# Allegro board ece457.brd
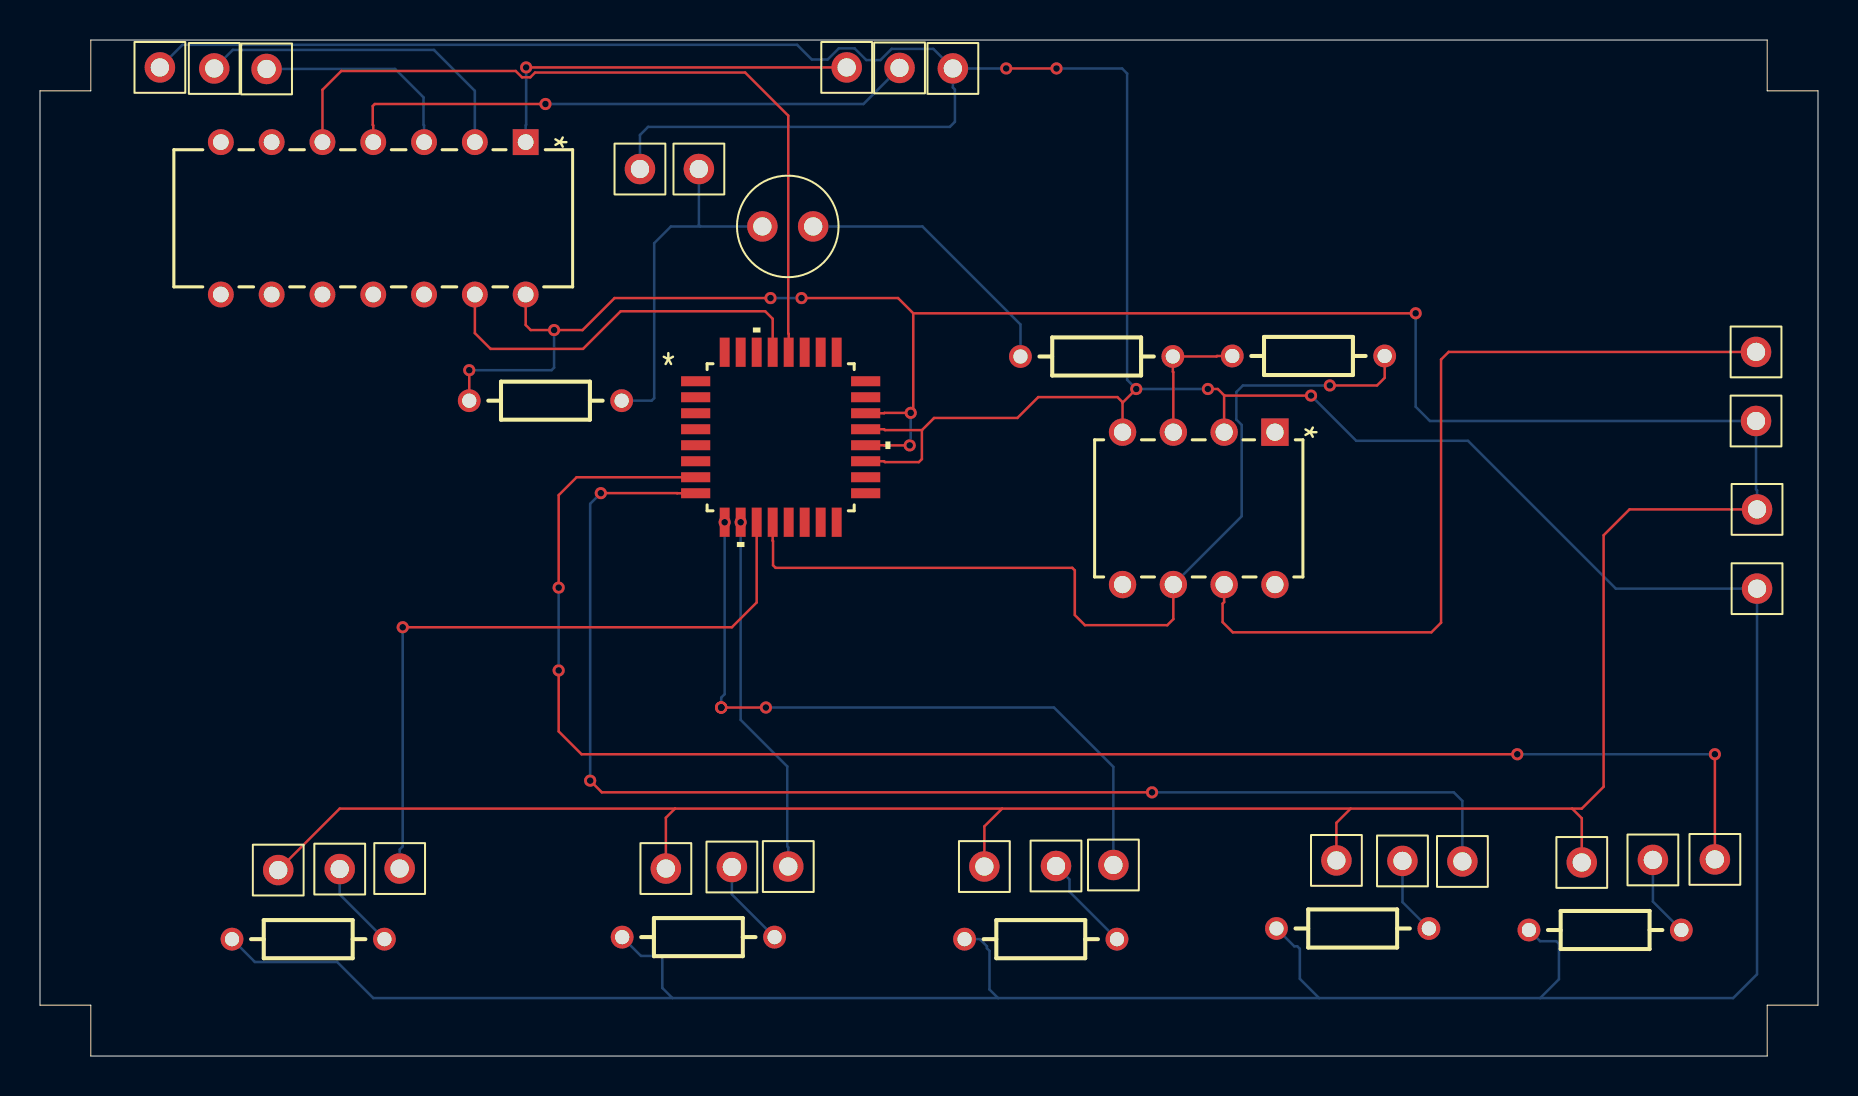
[diagram p0: board, top side]
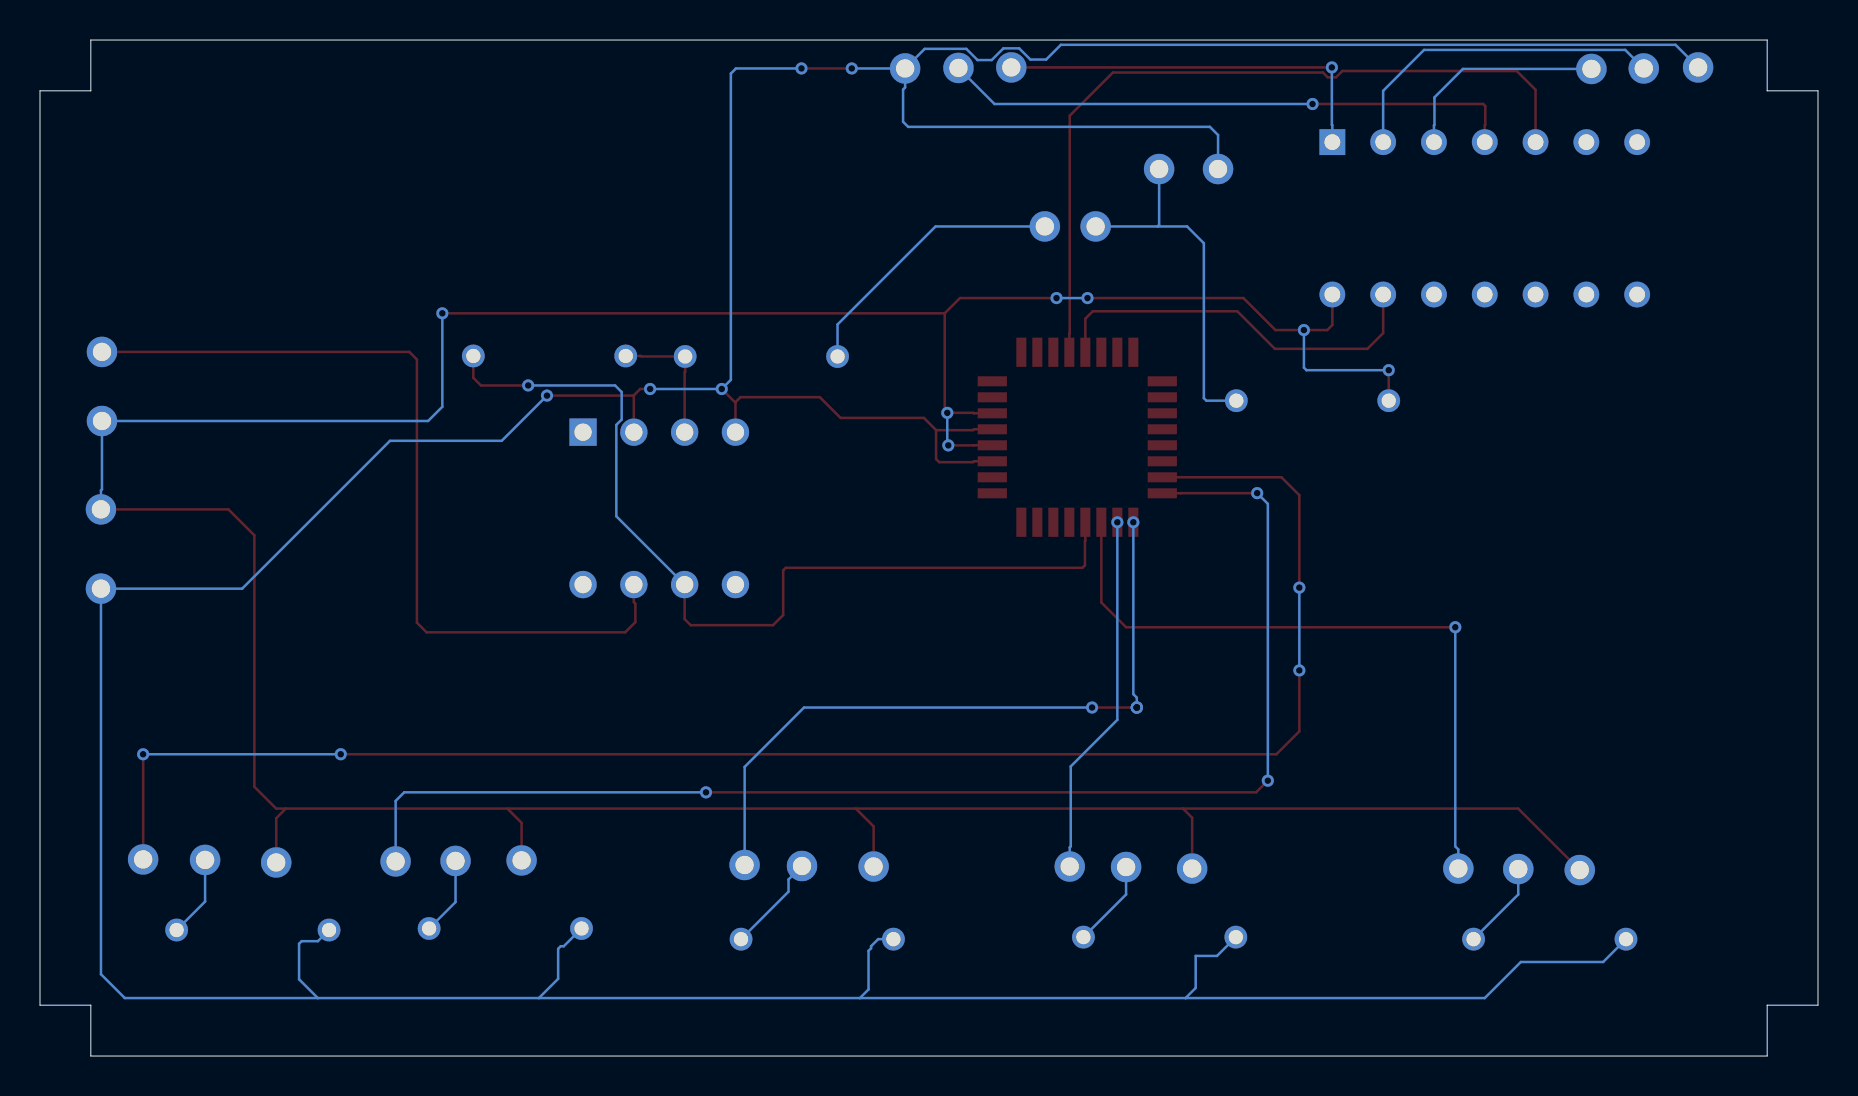
[diagram p1: board, bottom side, seen from below]

Outline 88.9 x 50.8 mm; copper layers: TOP, BOTTOM. Coordinates in mm from the lower left corner of the outline.
Outline path: 0,48.26 2.54,48.26 2.54,50.8 86.36,50.8 86.36,48.26 88.9,48.26 88.9,2.54 86.36,2.54 86.36,0 2.54,0 2.54,2.54 0,2.54 0,48.26

## Design rules (mm)
constraint set DEFAULT: min track width 0.127

## Placement (name value [footprint] x y rotation side)
C1  1u  [CAP196]  36.12 41.48 270 top
J7  CON1  [JUMPER1]  8.71 49.38 0 top
J8  CON1  [JUMPER1]  11.33 49.35 0 top
J9  CON1  [JUMPER1]  5.99 49.43 0 top
J10  CON1  [JUMPER1]  40.34 49.43 0 top
J11  CON1  [JUMPER1]  42.98 49.4 0 top
J12  CON1  [JUMPER1]  45.64 49.38 0 top
J13  CON1  [JUMPER1]  32.94 44.35 0 top
J14  CON1  [JUMPER1]  30 44.35 0 top
J15  CON1  [JUMPER1]  11.91 9.3 0 top
J16  CON1  [JUMPER1]  14.99 9.35 0 top
J17  CON1  [JUMPER1]  17.98 9.37 0 top
J18  CON1  [JUMPER1]  31.29 9.37 0 top
J19  CON1  [JUMPER1]  34.59 9.45 0 top
J20  CON1  [JUMPER1]  37.41 9.47 0 top
J21  CON1  [JUMPER1]  47.22 9.47 0 top
J22  CON1  [JUMPER1]  50.8 9.5 0 top
J23  CON1  [JUMPER1]  53.67 9.55 0 top
J24  CON1  [JUMPER1]  64.82 9.78 0 top
J25  CON1  [JUMPER1]  68.12 9.75 0 top
J26  CON1  [JUMPER1]  71.12 9.73 0 top
J27  CON1  [JUMPER1]  77.09 9.68 0 top
J28  CON1  [JUMPER1]  80.65 9.8 0 top
J29  CON1  [JUMPER1]  85.8 35.2 0 top
J30  CON1  [JUMPER1]  85.8 31.75 0 top
J31  CON1  [JUMPER1]  85.85 27.33 0 top
J32  CON1  [JUMPER1]  85.85 23.37 0 top
J33  CON1  [JUMPER1]  83.74 9.83 0 top
R6  2.2k  [AXRC05]  21.46 32.77 0 top
R7  RS  [AXRC05]  49.02 34.98 0 top
R8  RF  [AXRC05]  59.61 35 0 top
R9  4.7k  [AXRC05]  74.45 6.3 0 top
R10  4.7k  [AXRC05]  61.82 6.38 0 top
R11  4.7k  [AXRC05]  46.23 5.84 0 top
R12  4.7k  [AXRC05]  29.11 5.94 0 top
R13  4.7k  [AXRC05]  9.6 5.84 0 top
U11  ATMEGA328PB-AUR  [32A]  37.03 30.94 0 top
U12  UA741CPE4  [P8]  61.75 31.19 270 top
U13  CD4066BE  [N14]  24.28 45.69 270 top

## Library data of the parts
C1 = C: Tolerance: ***; User Part Number: ***
J7-J33 = CON1: User Part Number: ***
R6-R13 = R
U11 = ATMEGA328PB-AUR: User Part Number: PN; Tolerance: TOL
U12 = UA741CPE4: User Part Number: PN; Tolerance: TOL
U13 = CD4066BE: User Part Number: PN; Tolerance: TOL

## Footprints (pads in the part's own frame, mm; a bottom-side part is the same pattern mirrored in y, then rotated)
32A
  rect 1.461x0.501 smd: 1(-4.25,2.8) 2(-4.25,2) 3(-4.25,1.2) 4(-4.25,0.4) 5(-4.25,-0.4) 6(-4.25,-1.2) 7(-4.25,-2) 8(-4.25,-2.8) 17(4.25,-2.8) 18(4.25,-2) 19(4.25,-1.2) 20(4.25,-0.4) 21(4.25,0.4) 22(4.25,1.2) 23(4.25,2) 24(4.25,2.8)
  rect 0.501x1.461 smd: 9(-2.8,-4.25) 10(-2,-4.25) 11(-1.2,-4.25) 12(-0.4,-4.25) 13(0.4,-4.25) 14(1.2,-4.25) 15(2,-4.25) 16(2.8,-4.25) 25(2.8,4.25) 26(2,4.25) 27(1.2,4.25) 28(0.4,4.25) 29(-0.4,4.25) 30(-1.2,4.25) 31(-2,4.25) 32(-2.8,4.25)
AXRC05
  round 1.143 hole 0.711: 1(0,0) 2(7.62,0)
CAP196
  round 1.524 hole 0.914: 1(0,0) 2(0,2.54)
JUMPER1
  round 1.524 hole 0.914: 1(0,0)
N14
  rect 1.295x1.295 hole 0.787: 1(0,0)
  round 1.295 hole 0.787: 2(0,-2.54) 3(0,-5.08) 4(0,-7.62) 5(0,-10.16) 6(0,-12.7) 7(0,-15.24) 8(7.62,-15.24) 9(7.62,-12.7) 10(7.62,-10.16) 11(7.62,-7.62) 12(7.62,-5.08) 13(7.62,-2.54) 14(7.62,0)
P8
  rect 1.372x1.372 hole 0.864: 1(0,0)
  round 1.372 hole 0.864: 2(0,-2.54) 3(0,-5.08) 4(0,-7.62) 5(7.62,-7.62) 6(7.62,-5.08) 7(7.62,-2.54) 8(7.62,0)

## Nets
AVCC: U11.18
GND: U11.3
GND_1: U11.5
VCC: U11.4
VCC_1: U11.6(VCC_1)
VSS: U13.7(VSS)
0: J9.1 J12.1 J14.1 J32.1 R9.1 R10.1 R11.1 R12.1 R13.1 U11.19 U11.21 U12.2 U12.4(VCC-)
N19304: J15.1 J18.1 J21.1 J24.1 J27.1 J30.1 J31.1 R6.1 U11.20 U11.22 U13.14
N19310: C1.1 J13.1 R6.2
N19316: R7.2 R8.1 U12.3
N19318: R8.2 U11.12 U12.6
N19334: U11.29 U13.13
N19340: U11.28 U13.5
N19356: J7.1 U13.2
N19360: J11.1 U13.4
N19364: J10.1 U13.1
N19382: J8.1 U13.3
N19398: J17.1 U11.11
N19406: J20.1 U11.10
N19414: J23.1 U11.9
N19422: J26.1 U11.8
N19430: J33.1 U11.7
N19452: J29.1 U12.7
N19484: J28.1 R9.2
N19488: J25.1 R10.2
N19492: J22.1 R11.2
N19496: J19.1 R12.2
N19500: J16.1 R13.2
N200461: C1.2 R7.1

Pads without a net: U11 1 2 13 14 15 16 17 23 24 25 26 27 30 31 32; U12 1 5 8; U13 6 8 9 10 11 12

## Via types
v1: diameter 0.61, hole 0.33, TOP to BOTTOM, 30 vias

## Routing (per net, layer and track width the routed paths; a pad name or vN(x,y) marks a point on that pad's centre or on a via; arc(x,y) is an arc through that point)
0: length 259.6
  TOP w0.127: U11.19 42.2,29.74 42.25,29.69 43.94,29.69 44.09,29.84 44.09,31.29 ; U12.2 59.21,33.03 ; 59.21,33.03 58.89,33.35 v1(58.39,33.35) ; 59.21,33.03 59.22,33.02 v1(63.55,33.02) ; 44.09,31.29 42.25,31.29 42.2,31.34 U11.21 ; 44.09,31.29 44.7,31.9 48.87,31.9 49.91,32.94 53.87,32.94 54.13,32.69 54.13,32.66 ; 54.13,32.66 v1(54.81,33.35) ; 54.13,32.66 U12.4 ; v1(48.31,49.38) v1(50.83,49.38)
  BOTTOM w0.127: v1(58.39,33.35) v1(54.81,33.35) 54.36,33.81 54.36,49.12 54.1,49.38 v1(50.83,49.38) ; 47.9,2.9 63.96,2.9 ; 47.9,2.9 47.47,3.33 47.47,5.26 47.35,5.38 47.35,5.49 46.99,5.84 R11.1 ; 47.9,2.9 31.62,2.9 ; 63.96,2.9 75.01,2.9 ; 63.96,2.9 62.99,3.86 62.99,5.36 62.87,5.49 62.71,5.49 R10.1 ; R9.1 75.01,5.74 75.82,5.74 75.95,5.61 75.95,3.84 75.01,2.9 ; 75.01,2.9 84.66,2.9 85.85,4.09 J32.1 78.79,23.37 71.4,30.76 65.81,30.76 v1(63.55,33.02) ; J14.1 30,46.05 30.4,46.46 45.49,46.46 45.75,46.71 45.75,48.32 45.64,48.43 J12.1 ; J12.1 44.67,50.36 42.58,50.36 42.02,49.8 41.31,49.8 40.73,50.38 39.94,50.38 39.38,49.82 38.59,49.82 37.86,50.56 7.12,50.56 J9.1 ; J12.1 v1(48.31,49.38) ; 31.62,2.9 31.12,3.4 31.12,5 30.05,5 R12.1 ; 31.62,2.9 16.66,2.9 14.86,4.7 10.74,4.7 R13.1
N19304: length 193.4
  TOP w0.127: 31.75,12.37 48.11,12.37 ; 31.75,12.37 31.29,11.91 J18.1 ; 31.75,12.37 14.99,12.37 J15.1 ; 48.11,12.37 47.22,11.48 J21.1 ; 48.11,12.37 65.53,12.37 ; v1(38.07,37.9) 42.9,37.9 43.66,37.13 ; U11.20 42.2,30.54 42.21,30.53 v1(43.48,30.53) ; J31.1 79.48,27.33 78.18,26.04 78.18,13.46 77.09,12.37 76.61,12.37 ; 65.53,12.37 76.61,12.37 ; 65.53,12.37 64.82,11.66 J24.1 ; 76.61,12.37 77.09,11.89 J27.1 ; 43.66,37.13 v1(68.78,37.13) ; 43.66,37.13 43.66,32.28 v1(43.54,32.16) 42.22,32.16 42.2,32.14 U11.22 ; U13.14 24.28,36.55 24.54,36.3 v1(25.7,36.3) 27.13,36.3 28.73,37.9 v1(36.53,37.9) ; v1(21.46,34.29) R6.1
  BOTTOM w0.127: v1(43.48,30.53) 43.54,30.58 v1(43.54,32.16) ; J31.1 85.85,28.28 85.8,28.33 J30.1 69.49,31.75 68.78,32.46 v1(68.78,37.13) ; v1(36.53,37.9) v1(38.07,37.9) ; v1(25.7,36.3) 25.7,34.42 25.58,34.29 v1(21.46,34.29)
N19310: length 18.1
  BOTTOM w0.127: C1.1 33.02,41.48 ; 33.02,41.48 32.94,41.55 J13.1 ; 33.02,41.48 31.55,41.48 30.71,40.64 30.71,32.89 30.58,32.77 29.08,32.77
N19316: length 6.8
  TOP w0.127: U12.3 56.67,34.19 56.64,34.21 R7.2 58.83,34.98 58.85,35 R8.1
N19318: length 46.5
  TOP w0.127: R8.2 67.23,33.91 66.85,33.53 v1(64.49,33.53) ; U11.12 36.63,25.77 36.65,25.75 36.65,24.54 36.78,24.41 51.61,24.41 51.74,24.28 51.74,22.05 52.25,21.54 56.36,21.54 56.67,21.84 U12.6
  BOTTOM w0.127: U12.6 60.08,26.99 60.08,31.55 59.82,31.82 59.82,33.2 60.15,33.53 v1(64.49,33.53)
N19334: length 19.8
  TOP w0.127: U11.29 36.63,36.86 36.26,37.24 29.03,37.24 27.15,35.36 22.53,35.36 21.74,36.14 U13.13
N19340: length 39.3
  TOP w0.127: U11.28 37.43,36.11 37.41,36.13 37.41,47.02 35.26,49.17 24.75,49.17 24.51,48.93 24.1,48.93 23.79,49.25 15.06,49.25 14.12,48.31 U13.5
N19356: length 16.8
  BOTTOM w0.127: J7.1 9.64,50.3 19.7,50.3 21.74,48.26 U13.2
N19360: length 28.9
  TOP w0.127: v1(25.27,47.6) 16.74,47.6 16.64,47.5 16.64,46.56 16.66,46.53 U13.4
  BOTTOM w0.127: J11.1 41.17,47.6 v1(25.27,47.6)
N19364: length 19.8
  TOP w0.127: J10.1 v1(24.31,49.43)
  BOTTOM w0.127: v1(24.31,49.43) 24.31,46.56 24.28,46.53 U13.1
N19382: length 10.7
  BOTTOM w0.127: J8.1 17.75,49.35 19.18,47.93 19.18,46.56 19.2,46.53 U13.3
N19398: length 34.4
  TOP w0.127: v1(18.14,21.44) 34.59,21.44 35.83,22.68 U11.11
  BOTTOM w0.127: v1(18.14,21.44) 18.14,10.48 17.98,10.33 J17.1
N19406: length 18.2
  BOTTOM w0.127: v1(35.03,26.69) 35.03,16.81 37.36,14.48 37.36,10.48 37.41,10.43 J20.1
N19414: length 35.1
  TOP w0.127: v1(36.3,17.42) v1(34.06,17.42)
  BOTTOM w0.127: J23.1 53.67,14.45 50.7,17.42 v1(36.3,17.42) ; v1(34.23,26.69) 34.23,18.09 34.06,17.92 v1(34.06,17.42)
N19422: length 66.4
  TOP w0.127: U11.8 31.86,28.14 31.86,28.14 v1(28.04,28.14) ; v1(27.51,13.77) 28.09,13.18 v1(55.6,13.18)
  BOTTOM w0.127: J26.1 71.12,12.75 70.69,13.18 v1(55.6,13.18) ; v1(28.04,28.14) 27.51,27.61 v1(27.51,13.77)
N19430: length 82.6
  TOP w0.127: U11.7 26.83,28.94 25.93,28.04 v1(25.93,23.42) ; v1(25.93,19.28) 25.93,16.23 27.08,15.09 v1(73.86,15.09) ; J33.1 v1(83.74,15.09)
  BOTTOM w0.127: v1(83.74,15.09) v1(73.86,15.09) ; v1(25.93,19.28) v1(25.93,23.42)
N19452: length 42.3
  TOP w0.127: J29.1 70.43,35.2 70.05,34.82 70.05,21.67 69.57,21.18 59.64,21.18 59.13,21.69 59.13,22.62 59.21,22.69 U12.7
N19484: length 4.1
  BOTTOM w0.127: R9.2 80.65,7.72 J28.1
N19488: length 3.9
  BOTTOM w0.127: J25.1 68.12,7.7 R10.2
N19492: length 4.9
  BOTTOM w0.127: J22.1 51.47,8.83 51.47,8.22 R11.2
N19496: length 4.4
  BOTTOM w0.127: J19.1 34.59,8.08 R12.2
N19500: length 4.4
  BOTTOM w0.127: R13.2 14.99,8.08 J16.1
N200461: length 14
  BOTTOM w0.127: C1.2 44.12,41.48 49.02,36.58 R7.1
